# EAGLE board eagleproject (EAGLE 9.5.2)
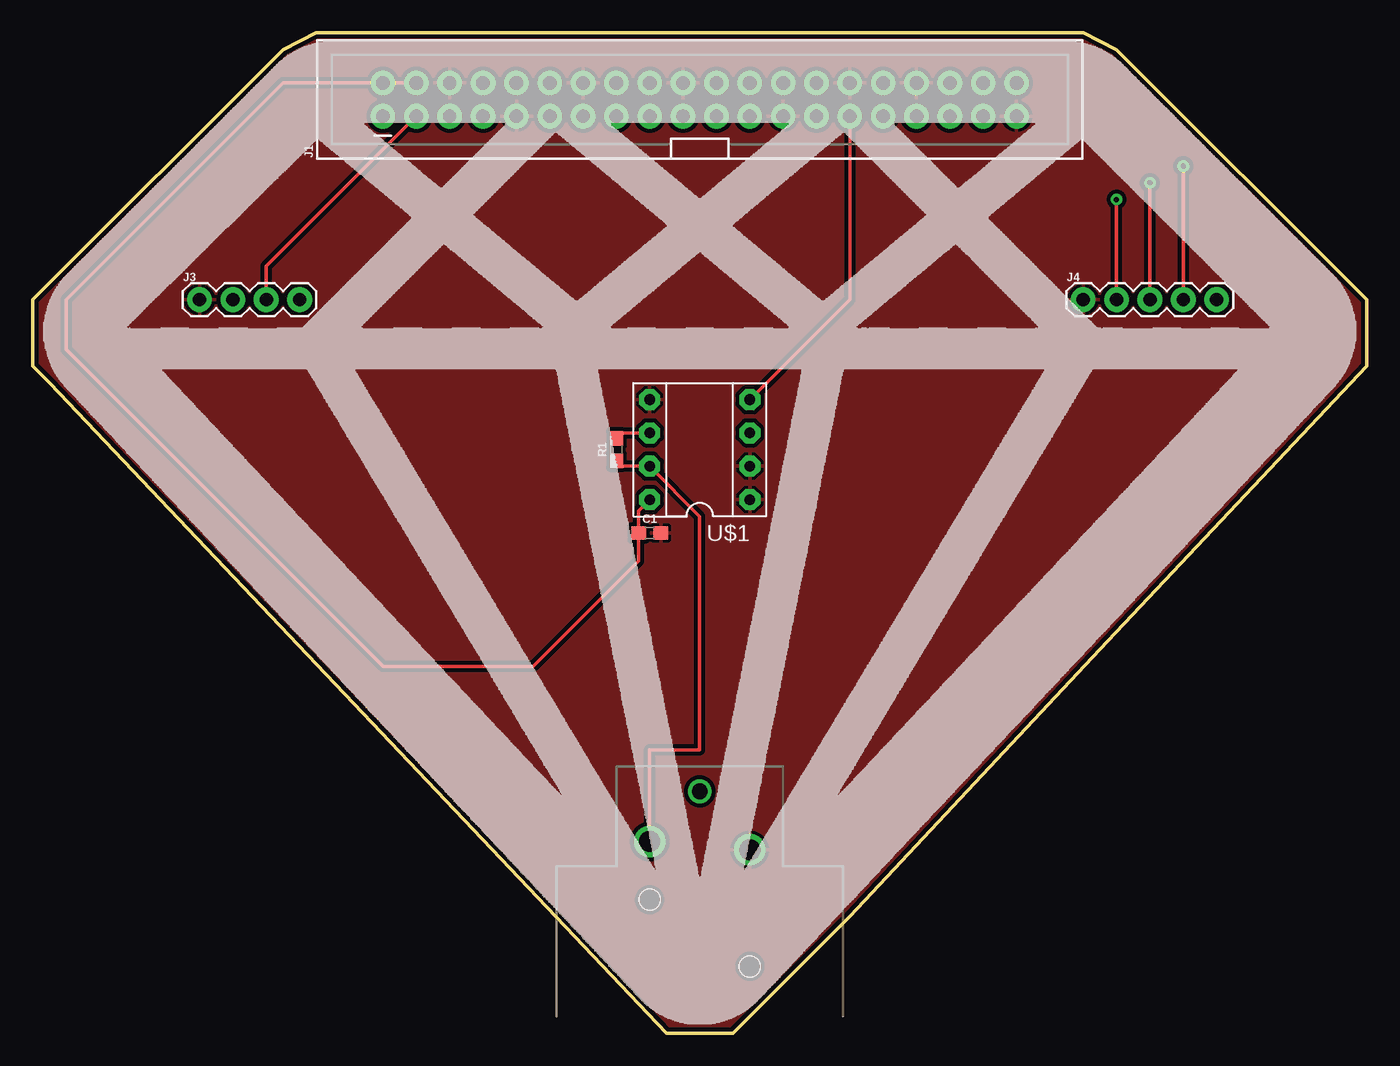
[diagram p0: board, top side]
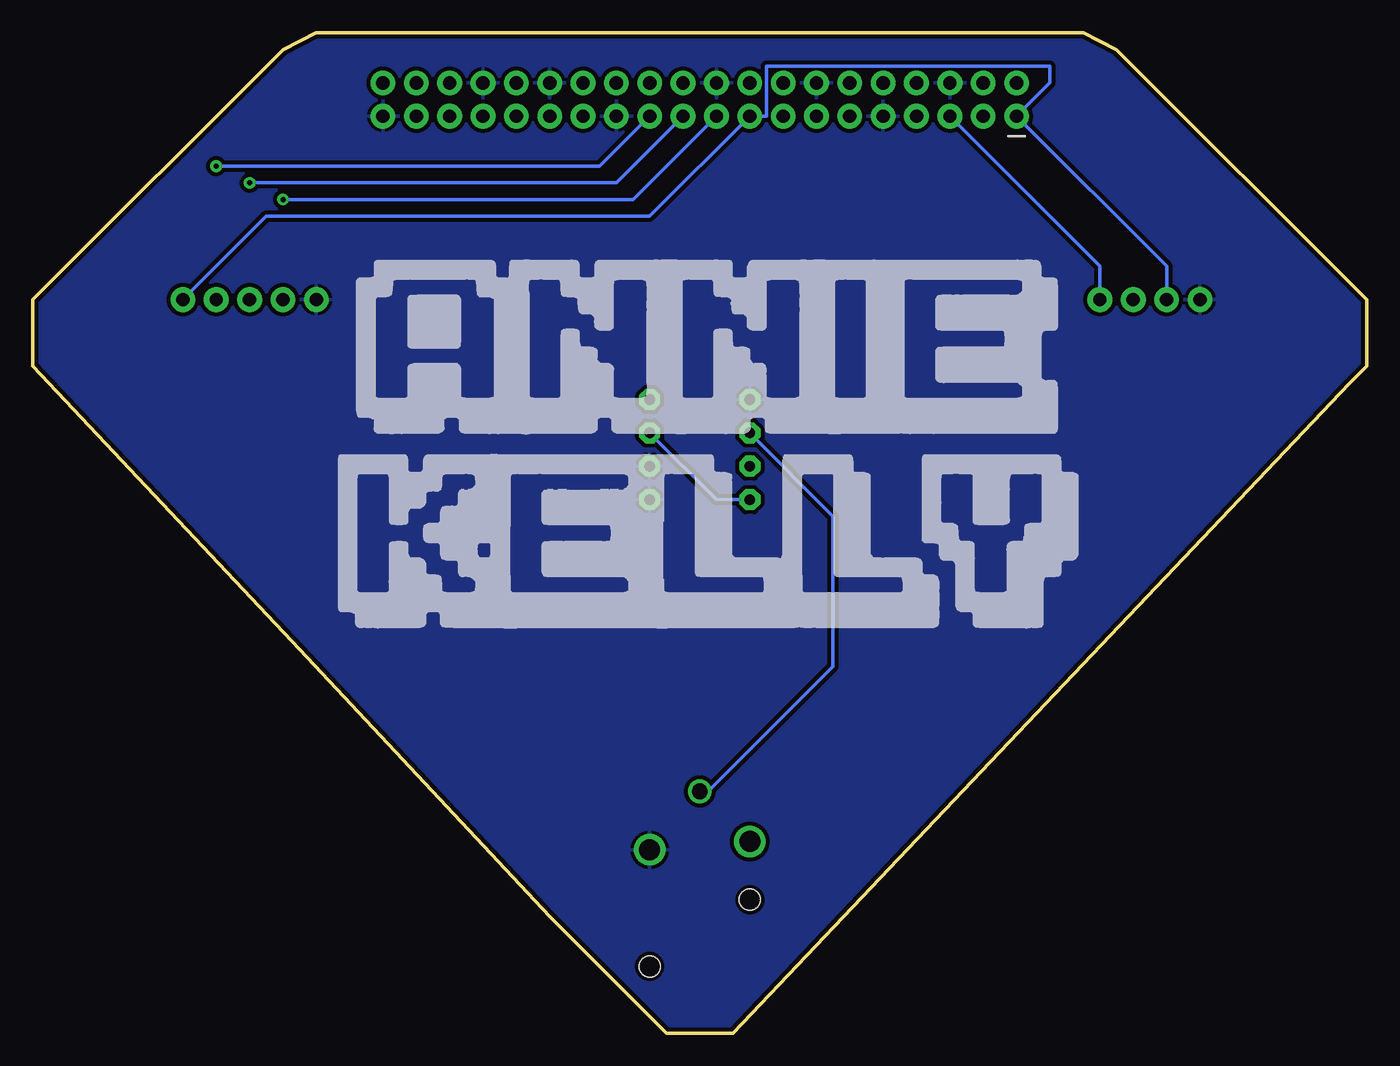
[diagram p1: board, bottom side, seen from below]

Size 101.6 x 76.2 mm. Coordinates in mm from the lower left corner, seen from the top.
Outline: 1.27,49.53 48.26,0 53.34,0 62.23,8.89 81.28,29.21 101.6,50.8 101.6,55.88 82.55,74.93 80.01,76.2 21.59,76.2 19.05,74.93 0,55.88 0,50.8 1.27,49.53
Copper layers (1*16): Top 0.035mm / dielectric 1.5mm / Bottom 0.035mm
Design rules "SparkFun-2-layer-STANDARD": minimum track width 10mil, minimum drill 20mil, track to track 10mil, track to pad 8mil, pad to pad 8mil, via to via 10mil, smd to smd 8mil, copper to edge 8mil, drill to drill 8mil, minimum pad ring 10mil, minimum via ring 10mil, stop-mask expansion 4mil, vias tented up to drill 25mil, thermal gap 10mil

## Footprints (pad centres in the part's own frame; a part is rotated, then mirrored left to right if it is on the bottom)
0603 = smd 1.1 x 1: 1 -0.85,0; 2 0.85,0
2X20_SHROUDED = drill 1.016 pad 1.88: 1 -1.27,24.13; 2 1.27,24.13; 3 -1.27,21.59; 4 1.27,21.59; 5 -1.27,19.05; 6 1.27,19.05; 7 -1.27,16.51; 8 1.27,16.51; 9 -1.27,13.97; 10 1.27,13.97; 11 -1.27,11.43; 12 1.27,11.43; 13 -1.27,8.89; 14 1.27,8.89; 15 -1.27,6.35; 16 1.27,6.35; 17 -1.27,3.81; 18 1.27,3.81; 19 -1.27,1.27; 20 1.27,1.27; 21 -1.27,-1.27; 22 1.27,-1.27; 23 -1.27,-3.81; 24 1.27,-3.81; 25 -1.27,-6.35; 26 1.27,-6.35; 27 -1.27,-8.89; 28 1.27,-8.89; 29 -1.27,-11.43; 30 1.27,-11.43; 31 -1.27,-13.97; 32 1.27,-13.97; 33 -1.27,-16.51; 34 1.27,-16.51; 35 -1.27,-19.05; 36 1.27,-19.05; 37 -1.27,-21.59; 38 1.27,-21.59; 39 -1.27,-24.13; 40 1.27,-24.13
XLR-3_FEMALE = drill 1.6: 1 -3.81,0; 2 3.81,-0.635 | drill 1.2: 3 0,-4.445 | hole 1.6: -3.81,8.89; 3.81,3.81
1X04 = drill 1.016 pad 1.88: 1 0,0; 2 2.54,0; 3 5.08,0; 4 7.62,0
1X05 = drill 1.016 pad 1.88: 1 0,0; 2 2.54,0; 3 5.08,0; 4 7.62,0; 5 10.16,0
DIL08 = drill 0.813 pad 1.6 octagon: 1 -3.81,-3.81; 2 -1.27,-3.81; 3 1.27,-3.81; 4 3.81,-3.81; 5 3.81,3.81; 6 1.27,3.81; 7 -1.27,3.81; 8 -3.81,3.81

## Placement (x,y rotation side)
C1  0.1uF  [0603]  46.99,38.1 0 top
J1  RASPBERRYPI-40-PIN-GPIO_PTH  [2X20_SHROUDED]  50.8,71.12 90 top
J2  XLR-3-FEMALE  [XLR-3_FEMALE]  50.8,13.97 180 top
J3  [1X04]  12.7,55.88 0 top
J4  [1X05]  80.01,55.88 0 top
R1  100  [0603]  44.45,44.45 90 top
U$1  MAX485DIL  [DIL08]  50.8,44.45 90 top
U$2  [DIAMONDIMAGE#JPEG]  50.8,38.1 0 top
U$3  [NAMEFORPCB#JPG]  50.8,44.45 0 bottom

## Library data of the parts
C1 = SparkFun-Capacitors; PROD_ID: CAP-00810
J1 = SparkFun-Connectors; PROD_ID: CONN-12263; SF_ID: PRT-13054
J2 = SparkFun-Connectors; PROD_ID: CONN-14142
J3 J4 = SparkFun-Connectors
R1 = SparkFun-Resistors; PROD_ID: RES-12438
U$1 = SparkFun-Retired
U$2 = diamondimage#jpeg
U$3 = nameforpcb#jpg2

## Nets
3.3V: J1.1 J1.17 J3.2 J4.5
5V: C1.1 J1.2 J1.4 U$1.3 U$1.8
A: J2.3 R1.2 U$1.6
B: J2.2 R1.1 U$1.7
DI: J1.29 U$1.4
GND: C1.2 J1.6 J1.9 J1.14 J1.20 J1.25 J1.30 J1.34 J1.39 J2.1 J3.1 J4.1 U$1.1 U$1.2 U$1.5
MISO: J1.21 J4.3
MOSI: J1.19 J4.2
SCL: J1.5 J3.4
SCLK: J1.23 J4.4
SDA: J1.3 J3.3

## Tracks (layer width: path | path; a pad name or v marks a point on that pad's centre or on a via)
3.3V
  Bottom 0.254: J3.2 15.24,58.42 J1.1 24.13,72.39 24.13,73.66 45.72,73.66 45.72,69.85 J1.17 54.61,62.23 83.82,62.23 J4.5
5V
  Top 0.254: U$1.8 46.14,39.79 C1.1 46.14,35.98 38.1,27.94 26.67,27.94 2.54,52.07 2.54,55.88 19.05,72.39 J1.2 J1.4
  Bottom 0.254: U$1.3 49.53,40.64 U$1.8
A
  Top 0.254: R1.2 44.87,45.72 U$1.6
  Bottom 0.254: J2.3 50.16,18.41 40.64,27.94 40.64,39.37 U$1.6
B
  Top 0.254: R1.1 44.87,43.18 U$1.7 50.8,39.37 50.8,21.59 46.99,21.59 J2.2
DI
  Top 0.254: U$1.4 62.23,55.88 J1.29
GND
  pour Bottom (isolate 0.305): 48.26,0 53.34,0 101.6,50.8 101.6,55.88 82.55,74.93 80.01,76.2 21.59,76.2 19.05,74.93 0,55.88 0,50.8
  pour Top (isolate 0.305): 50.8,0 53.34,0 101.6,50.8 101.6,55.88 82.55,74.93 80.01,76.2 21.59,76.2 19.05,74.93 0,55.88 0,50.8 48.26,0
MISO  (via drill 0.38)
  Top 0.254: v85.09,64.77 J4.3
  Bottom 0.254: J1.21 57.15,64.77 v85.09,64.77
MOSI  (via drill 0.38)
  Top 0.254: v82.55,63.5 J4.2
  Bottom 0.254: J1.19 55.88,63.5 v82.55,63.5
SCL
  Bottom 0.254: J3.4 20.32,58.42 J1.5
SCLK  (via drill 0.38)
  Top 0.254: v87.63,66.04 J4.4
  Bottom 0.254: J1.23 58.42,66.04 v87.63,66.04
SDA
  Top 0.254: J3.3 17.78,58.42 J1.3